# Altium PCB AUX_POWER_5V.PcbDoc
Units mil, origin at the board's own origin, x right, y up, seen from the top; angles counter-clockwise.
Board outline 1155.03 x 1020.03 mil, 2 copper layers (Top Layer, Bottom Layer); 16 components, 10 nets, 48 pads, 0 vias.
Unrouted connection lines stored in the file: 1.
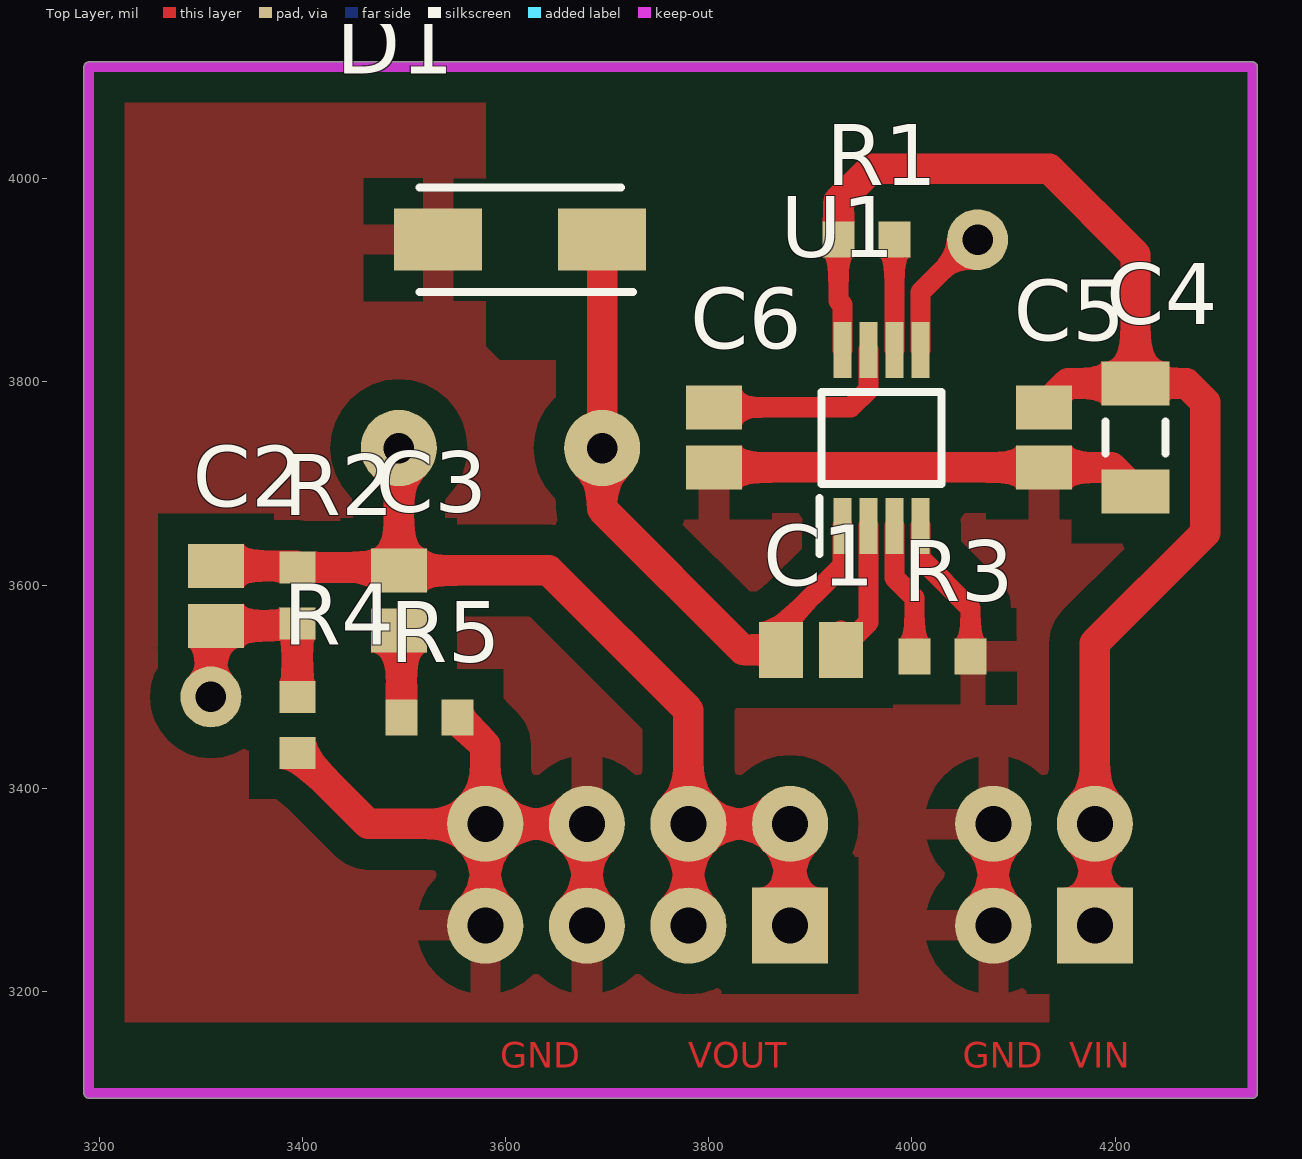
[diagram p0: Top Layer view]
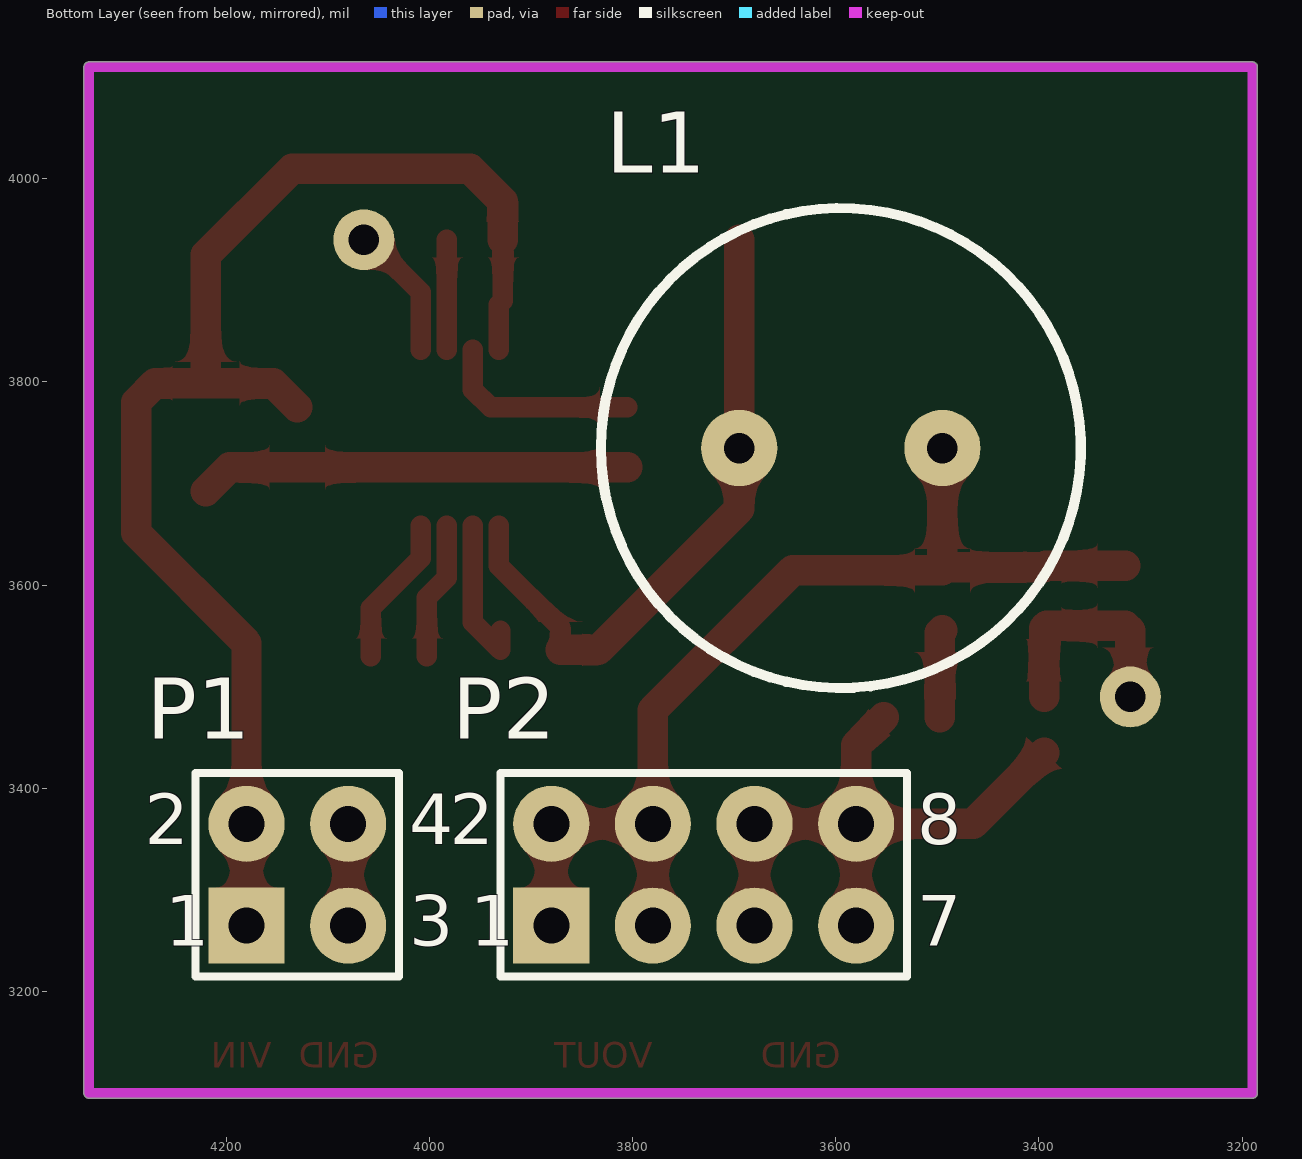
[diagram p1: Bottom Layer view, seen from below]

## Layer stack, top to bottom
Top Solder: solder mask 0.4, Solder Resist, Dk 3.5
Top Layer: signal copper 1.4
Dielectric 1: dielectric 12.6, FR-4, Dk 4.8
Bottom Layer: signal copper 1.4
Bottom Solder: solder mask 0.4, Solder Resist, Dk 3.5

## Board outline
3184.99,3100 ccw(c3190,3100) 3190,3094.99 4335,3094.99 ccw(c4335,3100) 4340.02,3100 4340.02,4110 ccw(c4335,4110) 4335,4115.02 3190,4115.02 ccw(c3190,4110) 3184.99,4110

## Design rules (kind name [scope] priority, off if disabled: settings)
Clearance [All] p1: gap=30 ignorepadtopadclearanceinfootprint=FALSE except(0: Arc-Arc Arc-Track Arc-SMDPad Arc-Hole Track-Track Track-SMDPad Track-Hole SMDPad-SMDPad SMDPad-Hole THPad-Hole Via-Hole Fill-Hole Poly-Hole Region-Hole Text-Hole; 10: Arc-THPad Arc-Via Arc-Text Track-THPad Track-Via Track-Text SMDPad-THPad SMDPad-Via SMDPad-Text THPad-THPad THPad-Via THPad-Text Via-Via Via-Text Fill-Text Poly-Text Region-Text Text-Text)
PolygonConnect [All] p1: connectstyle=Relief reliefconductorwidth=30 reliefentries=4 polygonreliefangle="90 Angle" airgapwidth=30
RoomDefinition AUX_POWER_5V [InComponentClass('AUX_POWER_5V')] p1: confinementstyle=ConfineIn formatcopy=TRUE lockcomponents=FALSE outline 3190,3100 4335,3100 4335,4110 3190,4110
RoutingVias [All] p1: holewidth=28 width=50 viastyle="Through Hole" minholewidth=28 minwidth=50 maxholewidth=28 maxwidth=50
SolderMaskExpansion [All] p1: expansion=4
Width [All] p1: maxlimit=50 minlimit=10 preferedwidth=30 bottomlayer_maxwidth=10 bottomlayer_prefwidth=10 minimp=50.000000 maximp=50.000000 favimp=50.000000
30 further rules are at their usual default settings.

## Components (designator, comment, footprint, x,y, rotation, side; value= is the part's Value field where it differs from the comment)
C1 "Cap" C0805 3900.47,3536.42 r0 top value=10nF
C2 "Cap" C0805 3315,3589.53 r90 top value=1.6nF
C3 "Cap" C0805 3495,3585 r90 top value=10uF
C4 "Cap Pol1" C1206 4220,3745.47 r270 top value=33uF
C5 "Cap" C0805 4130,3745.47 r90 top value=100nF
C6 "Cap" C0805 3805,3745.47 r90 top value=1uF
D1 "SS34" DIOM5026X262N 3614.29,3940 r180 top
L1 "SRU1048-331Y" INDUCTOR 3695,3735 r180 bottom value=270uF
P1 "Header 2X2" HDR2X2 4180,3265 r180 bottom
P2 "Header 4X2" HDR2X4 3880,3265 r180 bottom
R1 "Res1" 1608[0603] 3955.24,3940 r0 top value=249K
R2 "Res1" 1608[0603] 3395,3590 r90 top value=10K
R3 "Res1" 1608[0603] 4030,3530 r180 top value=133K
R4 "Res1" 1608[0603] 3395,3462.44 r90 top value=10K
R5 "Res1" 1608[0603] 3525,3470 r180 top value=590m
U1 "LM5008MM/NOPB" SOP65P490X110-8N 3970,3745 r90 top value=N/A

## Footprints (in the part's own frame and the unit in brackets; to place one, negate y for a bottom-side part, rotate by r counter-clockwise, add the part's x,y. Pads: shape width x height; smd on the part's side, far side on the other; paste and mask are expansions set on the pad)
1608[0603] [mm] "Chip Capacitor, Body 1.6x0.8mm, IPC High Density"
  rect 0.8x0.9 smd: 1(-0.7,0) 2(0.7,0)
  body extent -0.87,-0.48 0.87,0.48, height 1.3
C0805 [mm] "Chip Capacitor, Body 2.0x1.3mm, IPC High Density"
  rect 1.1x1.4 smd: 1(-0.75,0) 2(0.75,0)
  body extent -1.1,-0.72 1.1,0.72, height 1.4
C1206 [mm] "Chip Capacitor, Body 3.2x1.6mm, IPC High Density"
  rect 1.1x1.7 smd: 1(-1.35,0) 2(1.35,0)
  silkscreen extent -0.4,-0.75 0.4,0.75, body extent -1.7,-0.9 1.7,0.9, height 1.3
DIOM5026X262N [mm]
  rect 2.2x1.55 smd: 1(-2.05,0) 2(2.05,0)
  silkscreen extent -2.83,-1.31 2.52,1.31, body extent -2.52,-1.31 2.52,1.31, height 2.62
HDR2X2 [mm] "Connector; Header; 2x2 Position"
  rect 1.905x1.905 hole 0.9: 1(0,0)
  round 1.905 hole 0.9: 2(0,2.54) 3(2.54,0) 4(2.54,2.54)
  silkscreen extent -1.27,-1.27 3.81,3.81
HDR2X4 [mm] "Connector; Header; 4x2 Position"
  rect 1.905x1.905 hole 0.9: 1(0,0)
  round 1.905 hole 0.9: 2(0,2.54) 3(2.54,0) 4(2.54,2.54) 5(5.08,0) 6(5.08,2.54) 7(7.62,0) 8(7.62,2.54)
  silkscreen extent -1.27,-1.27 8.89,3.81
INDUCTOR [mil]
  round 75 hole 30: 1(0,0) 2(200,0)
  silkscreen extent -136,-236 336,236
SOP65P490X110-8N [mm]
  rect 1.4x0.45 smd: 1(-2.2,0.975) 2(-2.2,0.325) 3(-2.2,-0.325) 4(-2.2,-0.975) 5(2.2,-0.975) 6(2.2,-0.325) 7(2.2,0.325) 8(2.2,0.975)
  silkscreen extent -2.9,-1.5 1.15,1.55, body extent -2.45,-1.5 2.45,1.5, height 1.1

## Part data
C1 C2 C3 C5 C6: "Capacitor", LatestRevisionDate=17-Jul-2002, LatestRevisionNote="Re-released for DXP Platform.", PackageDescription="Radial Cap, Thru-Hole; 2 Leads; 0.3 in Pin Spacing", PackageReference=RAD-0.3, Published=8-Jun-2000, Publisher="Altium Limited"
C4: "Polarized Capacitor (Radial)", LatestRevisionDate=17-Jul-2002, LatestRevisionNote="Re-released for DXP Platform.", PackageDescription="Polarized Capacitor (Radial); 2 Leads", PackageReference=RB7.6-15, Published=8-Jun-2000, Publisher="Altium Limited"
D1: "Diode", Manufacturer_Name="Fairchild Semiconductor", Mouser Part Number=512-SS34, Datasheet Link=http://uk.rs-online.com/web/p/products/8080433, Height=2.65mm, Manufacturer_Part_Number=SS34, Mouser Price/Stock=https://www.mouser.com/Search/Refine.aspx?Keyword=512-SS34
L1: Manufacturer Name=Bourns, Manufacturer Part Number=SRU1048-331Y, PackageReference=SRU1048-331Y
P1: "Header, 2-Pin, Dual row", LatestRevisionDate=17-Jul-2002, LatestRevisionNote="Re-released for DXP Platform.", Publisher="Altium Limited"
P2: "Header, 4-Pin, Dual row", LatestRevisionDate=17-Jul-2002, LatestRevisionNote="Re-released for DXP Platform.", Publisher="Altium Limited"
R1 R2 R3 R4 R5: "Resistor", LatestRevisionDate=17-Jul-2002, LatestRevisionNote="Re-released for DXP Platform.", PackageDescription="Axial Device, Thru-Hole; 2 Leads; 0.3 in Pin Spacing", PackageReference=AXIAL-0.3, Published=8-Jun-2000, Publisher="Altium Limited"
U1: Manufacturer Name="Texas Instruments", Manufacturer Part Number=LM5008MM/NOPB, PackageReference=LM5008MM/NOPB

## Free pads (board coordinates)
  round 60 hole 30: 5(4064.53,3940) 6(3310,3490)

## Nets (pads, with @x,y where several pads share a name; then routed paths per layer and width w, separated by ;. In a path a pad name is that pad's centre, name@x,y a point inside that pad or via, vN(x,y) a via of type N, cw(c..) or ccw(c..) an arc to the next point about the centre after c; other vN are vias at no path point)
GND: C4.2 C5.1 C6.1 D1.2 P1.3 P1.4 P2.5 P2.6 P2.7 P2.8 R3.1 R4.1 R5.1 U1.4 | length 1303.9
  Top Layer w20: U1.4 4008.39,3626.61 4057.56,3577.44 R3.1
  Top Layer w30: R4.1 3464.88,3365 P2.8 ; R5.1 3580,3442.56 P2.8 ; P2.7 P2.8 ; P2.5 P2.6 P2.8 ; C6.1 C5.1 4196.38,3715.94 C4.2 ; P1.3 P1.4
NetC1_1: C1.1 D1.1 L1.1 U1.1 | length 645.4
  Top Layer w20: C1.1 3870.94,3558.44 3931.61,3619.11 U1.1
  Top Layer w30: D1.1 L1.1 3695,3675 3833.58,3536.42 C1.1
NetC1_2: C1.2 U1.2 | length 151.8
  Top Layer w20: C1.2@3930,3555 C1.2 3957.2,3563.62 U1.2
NetC2_1: C2.1 pad.5 pad.6 R2.1 R4.2 U1.5 | length 354.9
  Top Layer w20: U1.5 4008.39,3888.39 4060,3940 pad.5
  Top Layer w30: pad.6 3310,3555 C2.1 3392.56,3560 3395,3557.56 R4.2
NetC3_1: C3.1 R5.2 | length 86.5
  Top Layer w30: C3.1 3497.44,3553.03 R5.2
NetC6_2: C6.2 U1.7 | length 198.6
  Top Layer w20: C6.2 3939.7,3775 3957.2,3792.5 U1.7
NetR1_2: R1.2 U1.6 | length 108.4
  Top Layer w20: U1.6 R1.2
NetR3_2: R3.2 U1.3 | length 136.5
  Top Layer w20: U1.3 3982.8,3607.2 4002.44,3587.56 R3.2
VIN: C4.1 C5.2 P1.1 P1.2 R1.1 U1.8 | length 1351.1
  Top Layer w20: R1.1 3927.68,3880 3931.61,3876.06 U1.8
  Top Layer w30: R1.1 3927.68,3977.68 3960,4010 4135,4010 4220,3925 C4.1 ; C5.2 4153.62,3798.62 C4.1 ; P1.1 P1.2 4180,3543.03 4288.62,3651.65 4288.62,3780 4270,3798.62 C4.1
VOUT: C2.2 C3.2 L1.2 P2.1 P2.2 P2.3 P2.4 R2.2 | length 1056.4
  Top Layer w30: C2.2 3393.5,3619.06 R2.2 3491.97,3617.56 C3.2 ; L1.2 C3.2 ; P2.3 P2.4 ; P2.1 P2.2 P2.4 ; C3.2 3642.57,3614.53 3780,3477.09 P2.4

## Polygon pours and split planes (outlines as drawn)
GND on Top Layer "Top Layer-GND" (solid, remove dead copper, pour order 0): 4135,3170 4135,3379.61 4180.39,3425 4180.39,3543.03 4292.36,3655 4335.39,3655 4335.39,3820 4334.21,3821.18 3594.21,3821.18 3580.39,3835 3580.39,4110 3190,4110 3190,3170

## Keep-outs
Keep-Out Layer:
  lines w10: 3190,3100 4335,3100 4335,4110 3190,4110 3190,3100

## Other copper
Top Layer:
  text "GND" at 3595,3125 h25
  text "VOUT" at 3780,3125 h25
  text "GND" at 4050,3125 h25
  text "VIN" at 4155,3125 h25

## Text inside footprints (layer, text, board x,y; h text height)
P1: Bottom Overlay "3" at 4020,3245 h50; Bottom Overlay "4" at 4020,3345 h50; Bottom Overlay "2" at 4280,3345 h50; Bottom Overlay "1" at 4260,3245 h50
P2: Bottom Overlay "8" at 3520,3345 h50; Bottom Overlay "7" at 3520,3245 h50; Bottom Overlay "1" at 3960,3245 h50; Bottom Overlay "2" at 3980,3345 h50